# Altium PCB MCU_FOR_DOWNLOAD_V6_4_PCS.PcbDoc (part 2 of 2)
Units mil, origin at the board's own origin, x right, y up, seen from the top; angles counter-clockwise.
Board outline 2364.06 x 3482.09 mil, 4 copper layers (Top, GND1, GND2, Bottom), stack 35.4 mil thick; 140 components, 38 nets, 573 pads, 472 vias.
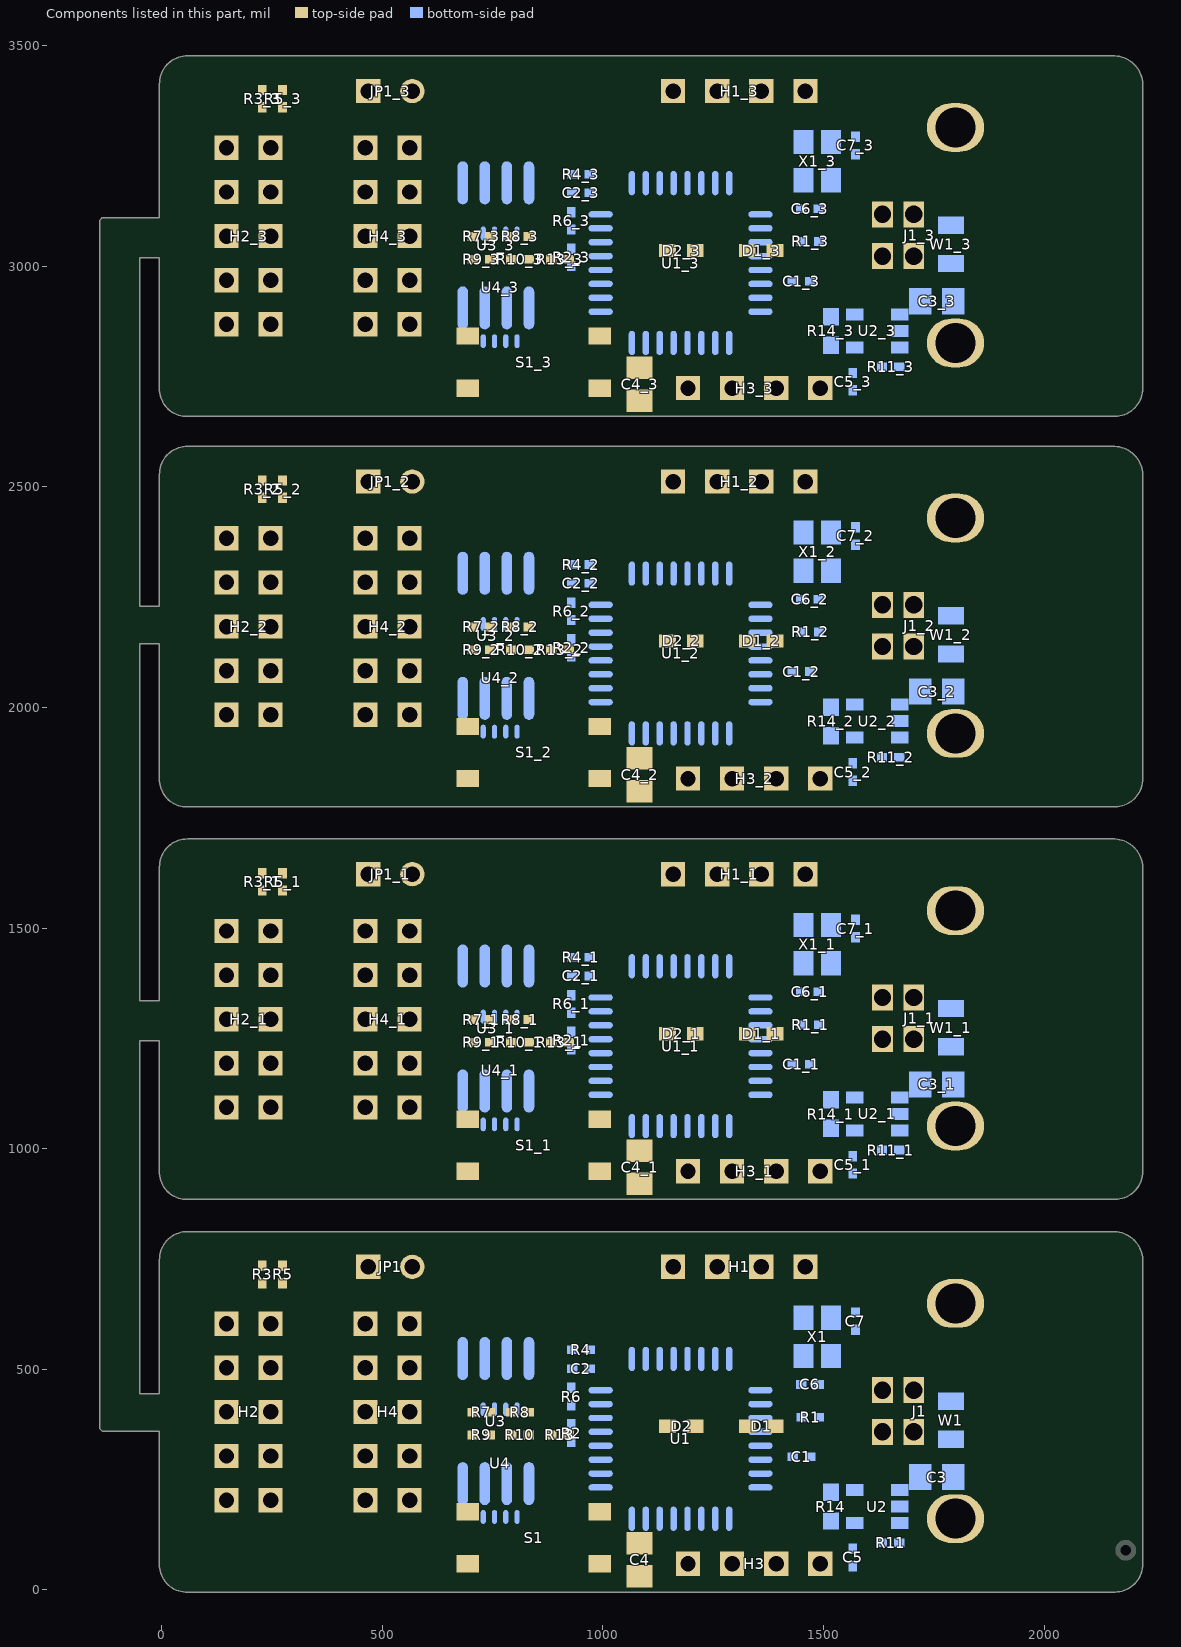
[diagram p2: the components of this part, seen from the top]

## Via types
v1: diameter 16/16/16/16 (per signal layer), hole 8, Top to Bottom, 468 vias
v2: diameter 55/55/55/55 (per signal layer), hole 37, Top to Bottom, 4 vias

## Nets (pads, with @x,y where several pads share a name; then routed paths per layer and width w, separated by ;. In a path a pad name is that pad's centre, name@x,y a point inside that pad or via, vN(x,y) a via of type N, cw(c..) or ccw(c..) an arc to the next point about the centre after c; other vN are vias at no path point) (continued)
copper on no net: | length 89868.4
  Top w7.87: v1(41.34,1641.97) 79.53,1680.16 644.09,1680.16 648.03,1676.22 v1(648.03,1673.07) ; v1(41.34,2531.97) 79.53,2570.16 644.09,2570.16 648.03,2566.22 v1(648.03,2563.07) ; v1(41.34,3416.97) 79.53,3455.16 644.09,3455.16 648.03,3451.22 v1(648.03,3448.07) ; 67.32,1585.28 69.69,1585.28 ; 67.32,2475.28 69.69,2475.28 ; 67.32,3360.28 69.69,3360.28 ; 146.85,1093.54 194.88,1141.57 329.92,1141.57 422.44,1049.06 594.49,1049.06 656.3,1110.87 1048.03,1110.87 v1(1074.41,1084.49) ; 146.85,1193.54 146.85,1194.72 192.52,1240.39 322.34,1240.39 409.45,1153.29 605.02,1153.29 617.32,1140.98 1081.69,1140.98 v1(1127.95,1094.72) ; 146.85,1493.54 149.2,1493.54 203.54,1439.2 203.54,1437.24 292.52,1437.24 314.57,1415.2 314.57,1344.33 425.59,1233.31 597.05,1233.31 674.8,1155.55 1155.71,1155.55 v1(1222.44,1088.82) ; 146.85,1983.54 194.88,2031.57 329.92,2031.57 422.44,1939.06 594.49,1939.06 656.3,2000.87 1048.03,2000.87 v1(1074.41,1974.49) ; 146.85,2083.54 146.85,2084.72 192.52,2130.39 322.34,2130.39 409.45,2043.29 605.02,2043.29 617.32,2030.98 1081.69,2030.98 v1(1127.95,1984.72) ; 146.85,2383.54 149.2,2383.54 203.54,2329.2 203.54,2327.24 292.52,2327.24 314.57,2305.2 314.57,2234.33 425.59,2123.31 597.05,2123.31 674.8,2045.55 1155.71,2045.55 v1(1222.44,1978.82) ; 146.85,2868.54 194.88,2916.57 329.92,2916.57 422.44,2824.06 594.49,2824.06 656.3,2885.87 1048.03,2885.87 v1(1074.41,2859.49) ; 146.85,2968.54 146.85,2969.72 192.52,3015.39 322.34,3015.39 409.45,2928.29 605.02,2928.29 617.32,2915.98 1081.69,2915.98 v1(1127.95,2869.72) ; 146.85,3268.54 149.2,3268.54 203.54,3214.2 203.54,3212.24 292.52,3212.24 314.57,3190.2 314.57,3119.33 425.59,3008.31 597.05,3008.31 674.8,2930.55 1155.71,2930.55 v1(1222.44,2863.82) ; v1(196.85,1054.96) 202.76,1054.96 238.58,1019.13 622.83,1019.13 v1@648.83,1045.13 ; v1(196.85,1944.96) 202.76,1944.96 238.58,1909.13 622.83,1909.13 v1@648.83,1935.13 ; v1(196.85,2829.96) 202.76,2829.96 238.58,2794.13 622.83,2794.13 v1@648.83,2820.13 ; 227.95,1624.65 274.02,1624.65 ; 227.95,2514.65 274.02,2514.65 ; 227.95,3399.65 274.02,3399.65 ; 246.85,1093.54 251.68,1093.54 255.02,1090.2 257.58,1090.2 314.17,1033.6 600.39,1033.6 663.78,1096.99 1025.89,1096.99 1059.65,1063.23 1135.33,1063.23 1156.59,1084.49 1156.99,1084.49 1156.99,1088.33 v1(1159.45,1090.79) ; 246.85,1193.54 327.17,1193.54 327.36,1193.74 385.83,1135.28 599.21,1135.28 609.06,1125.43 1063.78,1125.43 v1(1096.46,1092.76) ; 246.85,1493.54 246.85,1496.69 251.18,1501.02 251.18,1601.81 274.02,1624.65 ; 246.85,1983.54 251.68,1983.54 255.02,1980.2 257.58,1980.2 314.17,1923.6 600.39,1923.6 663.78,1986.99 1025.89,1986.99 1059.65,1953.23 1135.33,1953.23 1156.59,1974.49 1156.99,1974.49 1156.99,1978.33 v1(1159.45,1980.79) ; 246.85,2083.54 327.17,2083.54 327.36,2083.74 385.83,2025.28 599.21,2025.28 609.06,2015.43 1063.78,2015.43 v1(1096.46,1982.76) ; 246.85,2383.54 246.85,2386.69 251.18,2391.02 251.18,2491.81 274.02,2514.65 ; 246.85,2868.54 251.68,2868.54 255.02,2865.2 257.58,2865.2 314.17,2808.6 600.39,2808.6 663.78,2871.99 1025.89,2871.99 1059.65,2838.23 1135.33,2838.23 1156.59,2859.49 1156.99,2859.49 1156.99,2863.33 v1(1159.45,2865.79) ; 246.85,2968.54 327.17,2968.54 327.36,2968.74 385.83,2910.28 599.21,2910.28 609.06,2900.43 1063.78,2900.43 v1(1096.46,2867.76) ; 246.85,3268.54 246.85,3271.69 251.18,3276.02 251.18,3376.81 274.02,3399.65 ; 461.81,1493.54 460.63,1493.54 458.27,1491.18 458.86,1490.59 497.24,1452.2 759.45,1452.2 826.77,1384.88 869.29,1384.88 v1(872.05,1382.13) ; 461.81,2383.54 460.63,2383.54 458.27,2381.18 458.86,2380.59 497.24,2342.2 759.45,2342.2 826.77,2274.88 869.29,2274.88 v1(872.05,2272.13) ; 461.81,3268.54 460.63,3268.54 458.27,3266.18 458.86,3265.59 497.24,3227.2 759.45,3227.2 826.77,3159.88 869.29,3159.88 v1(872.05,3157.13) ; v1(692.91,1187.24) 693.31,1187.24 710.63,1169.92 1176.77,1169.92 v1(1185.04,1161.65) ; v1(692.91,1360.47) v1(1149.61,1360.47) ; v1(692.91,2077.24) 693.31,2077.24 710.63,2059.92 1176.77,2059.92 v1(1185.04,2051.65) ; v1(692.91,2250.47) v1(1149.61,2250.47) ; v1(692.91,2962.24) 693.31,2962.24 710.63,2944.92 1176.77,2944.92 v1(1185.04,2936.65) ; v1(692.91,3135.47) v1(1149.61,3135.47) ; 704.72,1292.76 704.72,1320.31 725.2,1340.79 874.8,1340.79 ; 704.72,2182.76 704.72,2210.31 725.2,2230.79 874.8,2230.79 ; 704.72,3067.76 704.72,3095.31 725.2,3115.79 874.8,3115.79 ; v1(753.94,1321.1) 753.54,1320.71 751.18,1320.71 744.09,1313.62 744.09,1292.76 744.09,1241.18 704.72,1241.18 706.5,1239.41 706.5,1227.99 ; v1(753.94,2211.1) 753.54,2210.71 751.18,2210.71 744.09,2203.62 744.09,2182.76 744.09,2131.18 704.72,2131.18 706.5,2129.41 706.5,2117.99 ; v1(753.94,3096.1) 753.54,3095.71 751.18,3095.71 744.09,3088.62 744.09,3067.76 744.09,3016.18 704.72,3016.18 706.5,3014.41 706.5,3002.99 ; v1(783.46,1321.1) 803.15,1321.1 831.5,1292.76 ; v1(783.46,2211.1) 803.15,2211.1 831.5,2182.76 ; v1(783.46,3096.1) 803.15,3096.1 831.5,3067.76 ; v1(791.34,1210.87) 795.67,1206.54 795.67,1206.34 1225.2,1206.34 1261.42,1242.56 1261.42,1295.12 v1(1309.06,1342.76) ; v1(791.34,2100.87) 795.67,2096.54 795.67,2096.34 1225.2,2096.34 1261.42,2132.56 1261.42,2185.12 v1(1309.06,2232.76) ; v1(791.34,2985.87) 795.67,2981.54 795.67,2981.34 1225.2,2981.34 1261.42,3017.56 1261.42,3070.12 v1(1309.06,3117.76) ; 792.13,1292.76 790.55,1292.76 767.5,1269.7 767.5,1240.79 767.13,1191.57 766.54,1188.43 ; 792.13,2182.76 790.55,2182.76 767.5,2159.7 767.5,2130.79 767.13,2081.57 766.54,2078.43 ; 792.13,3067.76 790.55,3067.76 767.5,3044.7 767.5,3015.79 767.13,2966.57 766.54,2963.43 ; 829.12,1291.95 829.12,1291.59 828.74,1291.22 828.74,1279.37 792.13,1242.76 792.13,1241.18 831.5,1241.18 832.28,1240.39 832.28,1238.03 838.39,1231.93 838.39,1230.75 v1(844.49,1224.65) ; 829.13,2131.18 792.13,2131.18 792.13,2132.76 828.74,2169.37 828.74,2181.22 829.12,2181.59 829.12,2181.95 ; 829.12,3066.95 829.12,3066.59 828.74,3066.22 828.74,3054.37 792.13,3017.76 792.13,3016.18 831.5,3016.18 832.28,3015.39 832.28,3013.03 838.39,3006.93 838.39,3005.75 v1(844.49,2999.65) ; 831.5,2131.18 832.28,2130.39 832.28,2128.03 838.39,2121.93 838.39,2120.75 v1(844.49,2114.65) ; 874.8,1241.57 874.8,1340.79 ; 874.8,2131.57 874.8,2230.79 ; 874.8,3016.57 874.8,3115.79 ; 883.07,1241.18 922.44,1241.18 v1(893.7,1269.92) ; 883.07,2131.18 922.44,2131.18 v1(893.7,2159.92) ; 883.07,3016.18 922.44,3016.18 v1(893.7,3044.92) ; v1(944.88,1069.13) 991.34,1069.13 993.31,1067.17 ; v1(944.88,1959.13) 991.34,1959.13 993.31,1957.17 ; v1(944.88,2844.13) 991.34,2844.13 993.31,2842.17 ; v1(948.82,1265.98) 1143.31,1265.98 1146.17,1263.13 1146.17,1260.87 ; v1(948.82,2155.98) 1143.31,2155.98 1146.17,2153.13 1146.17,2150.87 ; v1(948.82,3040.98) 1143.31,3040.98 1146.17,3038.13 1146.17,3035.87 ; v1(1191.73,1378.98) 1192.52,1378.19 1192.52,1372.68 1160.63,1340.79 874.8,1340.79 ; v1(1191.73,2268.98) 1192.52,2268.19 1192.52,2262.68 1160.63,2230.79 874.8,2230.79 ; v1(1191.73,3153.98) 1192.52,3153.19 1192.52,3147.68 1160.63,3115.79 874.8,3115.79 ; v1(1222.44,1122.28) 1223.62,1123.46 1283.86,1123.46 1309.65,1097.68 1583.27,1097.68 1639.76,1041.18 1640.16,1041.57 v1(1702.76,1041.57) ; v1(1222.44,2012.28) 1223.62,2013.46 1283.86,2013.46 1309.65,1987.68 1583.27,1987.68 1639.76,1931.18 1640.16,1931.57 v1(1702.76,1931.57) ; v1(1222.44,2897.28) 1223.62,2898.46 1283.86,2898.46 1309.65,2872.68 1583.27,2872.68 1639.76,2816.18 1640.16,2816.57 v1(1702.76,2816.57) ; v1(1263.78,1096.69) 1263.39,1082.13 1218.9,1037.64 v1(944.88,1037.64) 660.24,1037.64 649.21,1044.89 v1@648.83,1045.13 ; v1(1263.78,1986.69) 1263.39,1972.13 1218.9,1927.64 v1(944.88,1927.64) 660.24,1927.64 649.21,1934.89 v1@648.83,1935.13 ; v1(1263.78,2871.69) 1263.39,2857.13 1218.9,2812.64 v1(944.88,2812.64) 660.24,2812.64 649.21,2819.89 v1@648.83,2820.13 ; v1(1311.02,1311.26) 1309.45,1312.83 1305.12,1312.83 1301.77,1309.49 1300.98,1309.49 1280.51,1289.02 1280.51,1216.57 1252.36,1188.43 766.54,1188.43 ; v1(1311.02,2201.26) 1309.45,2202.83 1305.12,2202.83 1301.77,2199.49 1300.98,2199.49 1280.51,2179.02 1280.51,2106.57 1252.36,2078.43 766.54,2078.43 ; v1(1311.02,3086.26) 1309.45,3087.83 1305.12,3087.83 1301.77,3084.49 1300.98,3084.49 1280.51,3064.02 1280.51,2991.57 1252.36,2963.43 766.54,2963.43 ; v1(1322.83,1286.06) 1327.27,1281.63 1327.27,1260.87 ; v1(1322.83,2176.06) 1327.27,2171.63 1327.27,2150.87 ; v1(1322.83,3061.06) 1327.27,3056.63 1327.27,3035.87 ; 1390.26,1260.87 1390.26,1262.44 1405.91,1262.44 v1(1425.2,1281.73) ; 1390.26,2150.87 1390.26,2152.44 1405.91,2152.44 v1(1425.2,2171.73) ; 1390.26,3035.87 1390.26,3037.44 1405.91,3037.44 v1(1425.2,3056.73) ; 274.02,1624.65 274.02,1585.28 316.14,1585.28 381.89,1519.53 381.89,1374.25 411.42,1344.72 v1(600.39,1344.72) 701.97,1243.15 701.97,1241.18 701.97,1232.52 706.5,1227.99 ; 274.02,2514.65 274.02,2475.28 316.14,2475.28 381.89,2409.53 381.89,2264.25 411.42,2234.72 v1(600.39,2234.72) 701.97,2133.15 701.97,2131.18 701.97,2122.52 706.5,2117.99 ; 274.02,3399.65 274.02,3360.28 316.14,3360.28 381.89,3294.53 381.89,3149.25 411.42,3119.72 v1(600.39,3119.72) 701.97,3018.15 701.97,3016.18 701.97,3007.52 706.5,3002.99 ; v1@648.83,1045.13 v1(650.39,1046.69) 646.46,1046.69 v1@648.83,1045.13 ; v1@648.83,1935.13 v1(650.39,1936.69) 646.46,1936.69 v1@648.83,1935.13 ; v1@648.83,2820.13 v1(650.39,2821.69) 646.46,2821.69 v1@648.83,2820.13 ; 706.5,1227.99 743.5,1190.98 746.06,1188.43 766.54,1188.43 ; 706.5,2117.99 743.5,2080.98 746.06,2078.43 766.54,2078.43 ; 706.5,3002.99 743.5,2965.98 746.06,2963.43 766.54,2963.43
  Top w11.81: 69.69,1585.28 227.95,1585.28 ; 69.69,2475.28 227.95,2475.28 ; 69.69,3360.28 227.95,3360.28
  Top w19.68: 694.09,1067.17 944.88,1067.17 993.31,1067.17 ; 694.09,1957.17 944.88,1957.17 993.31,1957.17 ; 694.09,2842.17 944.88,2842.17 993.31,2842.17 ; 1083.07,920.63 1083.94,921.5 v1(1137.8,921.5) ; 1083.07,1810.63 1083.94,1811.5 v1(1137.8,1811.5) ; 1083.07,2695.63 1083.94,2696.5 v1(1137.8,2696.5)
  Top w22.05: v1(1035.43,909.69) 1072.13,909.69 1078.39,915.95 1083.07,920.63 ; v1(1035.43,1799.69) 1072.13,1799.69 1078.39,1805.95 1083.07,1810.63 ; v1(1035.43,2684.69) 1072.13,2684.69 1078.39,2690.95 1083.07,2695.63
  Top w23.62: 246.85,1393.54 246,1392.69 246,1386.61 205.51,1346.12 205.51,1344.72 67.32,1344.72 ; 246.85,2283.54 246,2282.69 246,2276.61 205.51,2236.12 205.51,2234.72 67.32,2234.72 ; 246.85,3168.54 246,3167.69 246,3161.61 205.51,3121.12 205.51,3119.72 67.32,3119.72 ; 468.11,1622.28 468.11,1623.46 436.61,1654.96 125.2,1654.96 67.32,1597.09 67.32,1585.28 67.32,1344.72 ; 468.11,2512.28 468.11,2513.46 436.61,2544.96 125.2,2544.96 67.32,2487.09 67.32,2475.28 67.32,2234.72 ; 468.11,3397.28 468.11,3398.46 436.61,3429.96 125.2,3429.96 67.32,3372.09 67.32,3360.28 67.32,3119.72 ; 568.11,1622.28 589.17,1601.22 589.57,1601.22 605.12,1585.67 1066.54,1585.67 1231.1,1421.1 1231.1,1384.88 ; 568.11,2512.28 589.17,2491.22 589.57,2491.22 605.12,2475.67 1066.54,2475.67 1231.1,2311.1 1231.1,2274.88 ; 568.11,3397.28 589.17,3376.22 589.57,3376.22 605.12,3360.67 1066.54,3360.67 1231.1,3196.1 1231.1,3159.88 ; 1083.07,995.59 1074.49,1004.17 662.2,1004.17 639.37,981.34 125.2,981.34 67.32,1039.21 67.32,1344.72 ; 1083.07,1885.59 1074.49,1894.17 662.2,1894.17 639.37,1871.34 125.2,1871.34 67.32,1929.21 67.32,2234.72 ; 1083.07,2770.59 1074.49,2779.17 662.2,2779.17 639.37,2756.34 125.2,2756.34 67.32,2814.21 67.32,3119.72 ; 1209.16,1260.87 1231.1,1282.81 1231.1,1384.88 ; 1209.16,2150.87 1231.1,2172.81 1231.1,2274.88 ; 1209.16,3035.87 1231.1,3057.81 1231.1,3159.88 ; v1(1397.64,1185.28) 1490.94,1278.58 v1@1518.9,1278.58 ; v1(1397.64,2075.28) 1490.94,2168.58 v1@1518.9,2168.58 ; v1(1397.64,2960.28) 1490.94,3053.58 v1@1518.9,3053.58 ; v1(1519.69,1277.8) v1@1518.9,1278.58 ; v1(1519.69,2167.8) v1@1518.9,2168.58 ; v1(1519.69,3052.8) v1@1518.9,3053.58 ; 1231.1,1384.88 1412.6,1384.88 v1@1518.9,1278.58 ; 1231.1,2274.88 1412.6,2274.88 v1@1518.9,2168.58 ; 1231.1,3159.88 1412.6,3159.88 v1@1518.9,3053.58
  Top w31.5: 1083.07,995.59 1095.2,1007.72 1283.86,1007.72 1333.46,1056.54 v2(1348.03,1056.54) ; 1083.07,1885.59 1095.2,1897.72 1283.86,1897.72 1333.46,1946.54 v2(1348.03,1946.54) ; 1083.07,2770.59 1095.2,2782.72 1283.86,2782.72 1333.46,2831.54 v2(1348.03,2831.54)
  Bottom w7.87: 146.85,1393.54 194.88,1441.57 413.78,1441.57 461.81,1393.54 508.27,1440 509.06,1440 509.84,1440.79 582.68,1440.79 601.57,1459.69 601.57,1497.09 637.4,1532.91 878.74,1532.91 966.14,1445.51 966.14,1434.09 966.14,1432.91 968.9,1432.91 970.08,1434.09 970.08,1391.58 970.08,1389.61 928.35,1347.87 ; 146.85,2283.54 194.88,2331.57 413.78,2331.57 461.81,2283.54 508.27,2330 509.06,2330 509.84,2330.79 582.68,2330.79 601.57,2349.69 601.57,2387.09 637.4,2422.91 878.74,2422.91 966.14,2335.51 966.14,2324.09 966.14,2322.91 968.9,2322.91 970.08,2324.09 970.08,2281.58 970.08,2279.61 928.35,2237.87 ; 146.85,3168.54 194.88,3216.57 413.78,3216.57 461.81,3168.54 508.27,3215 509.06,3215 509.84,3215.79 582.68,3215.79 601.57,3234.69 601.57,3272.09 637.4,3307.91 878.74,3307.91 966.14,3220.51 966.14,3209.09 966.14,3207.91 968.9,3207.91 970.08,3209.09 970.08,3166.58 970.08,3164.61 928.35,3122.87 ; 461.81,1193.54 511.42,1243.15 511.42,1243.94 598.82,1243.94 638.58,1283.7 638.58,1432.91 638.98,1433.31 638.98,1470.31 661.02,1492.36 753.9,1492.36 785.12,1461.14 785.12,1417.05 782.48,1414.41 782.48,1321.1 v1@782.48,1320.31 ; 461.81,2083.54 511.42,2133.15 511.42,2133.94 598.82,2133.94 638.58,2173.7 638.58,2322.91 638.98,2323.31 638.98,2360.31 661.02,2382.36 753.9,2382.36 785.12,2351.14 785.12,2307.05 782.48,2304.41 782.48,2211.1 v1@782.48,2210.31 ; 461.81,2968.54 511.42,3018.15 511.42,3018.94 598.82,3018.94 638.58,3058.7 638.58,3207.91 638.98,3208.31 638.98,3245.31 661.02,3267.36 753.9,3267.36 785.12,3236.14 785.12,3192.05 782.48,3189.41 782.48,3096.1 v1@782.48,3095.31 ; 463.55,1096.92 464.09,1096.92 465.75,1098.58 466.54,1098.58 507.56,1139.61 587.8,1139.61 728.74,1280.55 728.74,1299.45 728.74,1323.86 692.52,1360.08 v1@692.13,1360.47 ; 463.55,1986.92 464.09,1986.92 465.75,1988.58 466.54,1988.58 507.56,2029.61 587.8,2029.61 728.74,2170.55 728.74,2189.45 728.74,2213.86 692.52,2250.08 v1@692.13,2250.47 ; 463.55,2871.92 464.09,2871.92 465.75,2873.58 466.54,2873.58 507.56,2914.61 587.8,2914.61 728.74,3055.55 728.74,3074.45 728.74,3098.86 692.52,3135.08 v1@692.13,3135.47 ; 561.81,1193.54 575.2,1193.54 575.98,1192.76 658.27,1275.04 658.27,1461.26 673.23,1476.22 715.94,1476.22 732.48,1459.69 732.48,1414.41 733.86,1413.03 733.86,1370.71 754.33,1350.24 754.33,1321.1 v1(753.94,1321.1) 754.33,1320.71 754.33,1299.45 ; 561.81,1493.54 618.11,1549.84 929.53,1549.84 1044.49,1434.88 1044.49,1171.5 1026.77,1153.78 994.88,1153.78 994.09,1154.57 962.6,1154.57 835.83,1027.8 766.54,1027.8 754.33,1040 754.33,1055.35 754.33,1077.8 733.07,1099.06 733.07,1130.35 732.48,1130.94 ; 561.81,2083.54 575.2,2083.54 575.98,2082.76 658.27,2165.04 658.27,2351.26 673.23,2366.22 715.94,2366.22 732.48,2349.69 732.48,2304.41 733.86,2303.03 733.86,2260.71 754.33,2240.24 754.33,2211.1 v1(753.94,2211.1) 754.33,2210.71 754.33,2189.45 ; 561.81,2383.54 618.11,2439.84 929.53,2439.84 1044.49,2324.88 1044.49,2061.5 1026.77,2043.78 994.88,2043.78 994.09,2044.57 962.6,2044.57 835.83,1917.8 766.54,1917.8 754.33,1930 754.33,1945.35 754.33,1967.8 733.07,1989.06 733.07,2020.35 732.48,2020.94 ; 561.81,2968.54 575.2,2968.54 575.98,2967.76 658.27,3050.04 658.27,3236.26 673.23,3251.22 715.94,3251.22 732.48,3234.69 732.48,3189.41 733.86,3188.03 733.86,3145.71 754.33,3125.24 754.33,3096.1 v1(753.94,3096.1) 754.33,3095.71 754.33,3074.45 ; 561.81,3268.54 618.11,3324.84 929.53,3324.84 1044.49,3209.88 1044.49,2946.5 1026.77,2928.78 994.88,2928.78 994.09,2929.57 962.6,2929.57 835.83,2802.8 766.54,2802.8 754.33,2815 754.33,2830.35 754.33,2852.8 733.07,2874.06 733.07,2905.35 732.48,2905.94 ; 565.4,1100.1 569.82,1100.1 570.87,1099.06 677.97,1206.16 782.48,1206.16 782.48,1203.78 ; 565.4,1990.1 569.82,1990.1 570.87,1989.06 677.97,2096.16 782.48,2096.16 782.48,2093.78 ; 565.4,2875.1 569.82,2875.1 570.87,2874.06 677.97,2981.16 782.48,2981.16 782.48,2978.78 ; 682.48,1414.41 683.46,1413.43 683.46,1369.13 v1@692.13,1360.47 ; 682.48,2304.41 683.46,2303.43 683.46,2259.13 v1@692.13,2250.47 ; 682.48,3189.41 683.46,3188.43 683.46,3144.13 v1@692.13,3135.47 ; v1(692.91,1187.24) 692.91,1186.65 682.48,1176.22 ; v1(692.91,1360.47) v1@692.13,1360.47 ; v1(692.91,2077.24) 692.91,2076.65 682.48,2066.22 ; v1(692.91,2250.47) v1@692.13,2250.47 ; v1(692.91,2962.24) 692.91,2961.65 682.48,2951.22 ; v1(692.91,3135.47) v1@692.13,3135.47 ; 779.92,1055.35 779.92,1109.69 782.48,1112.24 782.48,1130.94 782.48,1203.78 ; 779.92,1299.45 782.48,1302.01 v1@782.48,1320.31 ; 779.92,1945.35 779.92,1999.69 782.48,2002.24 782.48,2020.94 782.48,2093.78 ; 779.92,2189.45 782.48,2192.01 v1@782.48,2210.31 ; 779.92,2830.35 779.92,2884.69 782.48,2887.24 782.48,2905.94 782.48,2978.78 ; 779.92,3074.45 782.48,3077.01 v1@782.48,3095.31 ; v1(783.46,1321.1) 782.68,1320.31 v1@782.48,1320.31 ; v1(783.46,2211.1) 782.68,2210.31 v1@782.48,2210.31 ; v1(783.46,3096.1) 782.68,3095.31 v1@782.48,3095.31 ; v1(791.34,1210.87) 784.25,1203.78 782.48,1203.78 ; v1(791.34,2100.87) 784.25,2093.78 782.48,2093.78 ; v1(791.34,2985.87) 784.25,2978.78 782.48,2978.78 ; 805.51,1055.35 805.51,1082.13 832.48,1109.09 832.48,1130.94 833.07,1131.54 833.07,1162.05 816.93,1178.19 816.93,1247.09 839.76,1269.92 v1(893.7,1269.92) 893.7,1360.47 v1(872.05,1382.13) ; 805.51,1945.35 805.51,1972.13 832.48,1999.09 832.48,2020.94 833.07,2021.54 833.07,2052.05 816.93,2068.19 816.93,2137.09 839.76,2159.92 v1(893.7,2159.92) 893.7,2250.47 v1(872.05,2272.13) ; 805.51,2830.35 805.51,2857.13 832.48,2884.09 832.48,2905.94 833.07,2906.54 833.07,2937.05 816.93,2953.19 816.93,3022.09 839.76,3044.92 v1(893.7,3044.92) 893.7,3135.47 v1(872.05,3157.13) ; v1(844.49,1224.65) 845.28,1224.65 884.65,1185.28 994.88,1185.28 ; v1(844.49,2114.65) 845.28,2114.65 884.65,2075.28 994.88,2075.28 ; v1(844.49,2999.65) 845.28,2999.65 884.65,2960.28 994.88,2960.28 ; 852.76,1414.41 853.94,1415.59 ; 852.76,2304.41 853.94,2305.59 ; 852.76,3189.41 853.94,3190.59 ; v1(910.63,1391.57) 911.02,1391.57 930.71,1391.57 ; v1(910.63,2281.57) 911.02,2281.57 930.71,2281.57 ; v1(910.63,3166.57) 911.02,3166.57 930.71,3166.57 ; 928.35,1225.83 948.82,1225.83 970.47,1247.48 994.09,1247.48 994.88,1248.27 ; 928.35,1265.2 948.03,1265.2 v1(948.82,1265.98) ; 928.35,1308.5 929.92,1308.5 964.17,1342.76 994.88,1342.76 ; 928.35,2115.83 948.82,2115.83 970.47,2137.48 994.09,2137.48 994.88,2138.27 ; 928.35,2155.2 948.03,2155.2 v1(948.82,2155.98) ; 928.35,2198.5 929.92,2198.5 964.17,2232.76 994.88,2232.76 ; 928.35,3000.83 948.82,3000.83 970.47,3022.48 994.09,3022.48 994.88,3023.27 ; 928.35,3040.2 948.03,3040.2 v1(948.82,3040.98) ; 928.35,3083.5 929.92,3083.5 964.17,3117.76 994.88,3117.76 ; v1(944.88,1037.64) 972.05,1037.64 1011.02,1076.61 1011.02,1083.7 ; v1(944.88,1069.13) 945.28,1069.53 945.28,1104.17 963.39,1122.28 994.88,1122.28 ; v1(944.88,1927.64) 972.05,1927.64 1011.02,1966.61 1011.02,1973.7 ; v1(944.88,1959.13) 945.28,1959.53 945.28,1994.17 963.39,2012.28 994.88,2012.28 ; v1(944.88,2812.64) 972.05,2812.64 1011.02,2851.61 1011.02,2858.7 ; v1(944.88,2844.13) 945.28,2844.53 945.28,2879.17 963.39,2897.28 994.88,2897.28 ; 1065.75,1051.42 1065.75,1075.83 v1(1074.41,1084.49) ; 1065.75,1413.62 1065.75,1449.45 1159.06,1542.76 1159.06,1622.28 ; 1065.75,1941.42 1065.75,1965.83 v1(1074.41,1974.49) ; 1065.75,2303.62 1065.75,2339.45 1159.06,2432.76 1159.06,2512.28 ; 1065.75,2826.42 1065.75,2850.83 v1(1074.41,2859.49) ; 1065.75,3188.62 1065.75,3224.45 1159.06,3317.76 1159.06,3397.28 ; v1(1074.8,1228.58) 1075.2,1228.19 1075.2,1147.87 ; v1(1074.8,2118.58) 1075.2,2118.19 1075.2,2037.87 ; v1(1074.8,3003.58) 1075.2,3003.19 1075.2,2922.87 ; v1(1096.46,1092.76) 1097.24,1091.97 1097.24,1051.42 ; v1(1096.46,1982.76) 1097.24,1981.97 1097.24,1941.42 ; v1(1096.46,2867.76) 1097.24,2866.97 1097.24,2826.42 ; 1097.24,1413.62 1097.24,1447.09 1259.06,1608.9 1259.06,1622.28 ; 1097.24,2303.62 1097.24,2337.09 1259.06,2498.9 1259.06,2512.28 ; 1097.24,3188.62 1097.24,3222.09 1259.06,3383.9 1259.06,3397.28 ; v1(1127.95,1094.72) 1128.74,1093.94 1128.74,1051.42 ; v1(1127.95,1984.72) 1128.74,1983.94 1128.74,1941.42 ; v1(1127.95,2869.72) 1128.74,2868.94 1128.74,2826.42 ; 1128.74,1413.62 1128.74,1447.48 1240.16,1558.9 1307.09,1558.9 1359.06,1610.87 1359.06,1622.28 ; 1128.74,2303.62 1128.74,2337.48 1240.16,2448.9 1307.09,2448.9 1359.06,2500.87 1359.06,2512.28 ; 1128.74,3188.62 1128.74,3222.48 1240.16,3333.9 1307.09,3333.9 1359.06,3385.87 1359.06,3397.28 ; v1(1149.61,1360.47) 1208.27,1360.47 1208.66,1360.08 1223.23,1374.65 1223.23,1413.62 ; v1(1149.61,2250.47) 1208.27,2250.47 1208.66,2250.08 1223.23,2264.65 1223.23,2303.62 ; v1(1149.61,3135.47) 1208.27,3135.47 1208.66,3135.08 1223.23,3149.65 1223.23,3188.62 ; v1(1159.45,1090.79) 1160.24,1090 1160.24,1051.42 ; v1(1159.45,1980.79) 1160.24,1980 1160.24,1941.42 ; v1(1159.45,2865.79) 1160.24,2865 1160.24,2826.42 ; 1160.24,1413.62 1160.24,1443.54 1254.33,1537.64 1377.56,1537.64 1450.79,1610.87 1459.06,1610.87 1459.45,1610.87 1459.45,1614.02 1459.06,1622.28 ; 1160.24,2303.62 1160.24,2333.54 1254.33,2427.64 1377.56,2427.64 1450.79,2500.87 1459.06,2500.87 1459.45,2500.87 1459.45,2504.02 1459.06,2512.28 ; 1160.24,3188.62 1160.24,3218.54 1254.33,3312.64 1377.56,3312.64 1450.79,3385.87 1459.06,3385.87 1459.45,3385.87 1459.45,3389.02 1459.06,3397.28 ; 1191.73,1051.42 1191.73,1091.18 1222.44,1121.89 v1(1222.44,1122.28) ; v1(1191.73,1378.98) 1191.73,1413.62 ; 1191.73,1941.42 1191.73,1981.18 1222.44,2011.89 v1(1222.44,2012.28) ; v1(1191.73,2268.98) 1191.73,2303.62 ; 1191.73,2826.42 1191.73,2866.18 1222.44,2896.89 v1(1222.44,2897.28) ; v1(1191.73,3153.98) 1191.73,3188.62 ; v1(1222.44,1088.82) 1223.23,1088.03 1223.23,1051.42 ; v1(1222.44,1978.82) 1223.23,1978.03 1223.23,1941.42 ; v1(1222.44,2863.82) 1223.23,2863.03 1223.23,2826.42 ; 1254.72,1051.42 1254.72,1012.05 1297.01,969.76 1297.01,949.26 1300.59,949.26 1292.91,949.06 ; 1254.72,1413.62 1254.72,1433.7 1281.5,1460.47 1473.62,1460.47 1512.99,1499.84 1512.99,1506.93 1512.99,1507.32 1516.22,1507.32 1516.61,1506.93 1543.31,1480.24 1543.31,1479.37 1572.44,1479.37 ; 1254.72,1941.42 1254.72,1902.05 1297.01,1859.76 1297.01,1839.26 1300.59,1839.26 1292.91,1839.06 ; 1254.72,2303.62 1254.72,2323.7 1281.5,2350.47 1473.62,2350.47 1512.99,2389.84 1512.99,2396.93 1512.99,2397.32 1516.22,2397.32 1516.61,2396.93 1543.31,2370.24 1543.31,2369.37 1572.44,2369.37 ; 1254.72,2826.42 1254.72,2787.05 1297.01,2744.76 1297.01,2724.26 1300.59,2724.26 1292.91,2724.06 ; 1254.72,3188.62 1254.72,3208.7 1281.5,3235.47 1473.62,3235.47 1512.99,3274.84 1512.99,3281.93 1512.99,3282.32 1516.22,3282.32 1516.61,3281.93 1543.31,3255.24 1543.31,3254.37 1572.44,3254.37 ; 1286.22,1051.42 1286.22,1013.62 1306.5,993.35 1359.06,993.35 1398.13,954.27 1400.79,951.61 1392.91,949.06 ; 1286.22,1413.62 1286.22,1434.09 1294.88,1442.76 1438.58,1442.76 1455.04,1426.3 1455.04,1420.31 1455.04,1414.33 1449.61,1408.9 1449.61,1355.75 ; 1286.22,1941.42 1286.22,1903.62 1306.5,1883.35 1359.06,1883.35 1398.13,1844.27 1400.79,1841.61 1392.91,1839.06 ; 1286.22,2303.62 1286.22,2324.09 1294.88,2332.76 1438.58,2332.76 1455.04,2316.3 1455.04,2310.31 1455.04,2304.33 1449.61,2298.9 1449.61,2245.75 ; 1286.22,2826.42 1286.22,2788.62 1306.5,2768.35 1359.06,2768.35 1398.13,2729.27 1400.79,2726.61 1392.91,2724.06 ; 1286.22,3188.62 1286.22,3209.09 1294.88,3217.76 1438.58,3217.76 1455.04,3201.3 1455.04,3195.31 1455.04,3189.33 1449.61,3183.9 1449.61,3130.75 ; v1(1309.06,1342.76) 1357.09,1342.76 ; v1(1309.06,2232.76) 1357.09,2232.76 ; v1(1309.06,3117.76) 1357.09,3117.76 ; v1(1311.02,1311.26) 1357.09,1311.26 ; v1(1311.02,2201.26) 1357.09,2201.26 ; v1(1311.02,3086.26) 1357.09,3086.26 ; v1(1322.83,1286.06) 1328.6,1280.3 1328.6,1280.01 1328.85,1279.76 1357.09,1279.76 1381.89,1279.76 v1(1395.67,1293.54) ; v1(1322.83,2176.06) 1328.6,2170.3 1328.6,2170.01 1328.85,2169.76 1357.09,2169.76 1381.89,2169.76 v1(1395.67,2183.54) ; v1(1322.83,3061.06) 1328.6,3055.3 1328.6,3055.01 1328.85,3054.76 1357.09,3054.76 1381.89,3054.76 v1(1395.67,3068.54) ; v1(1425.2,1281.73) 1450,1281.73 1450.39,1281.34 ; v1(1425.2,2171.73) 1450,2171.73 1450.39,2171.34 ; v1(1425.2,3056.73) 1450,3056.73 1450.39,3056.34 ; 1469.68,1191.58 1489.76,1191.58 v1(1490.16,1191.18) ; 1469.68,2081.58 1489.76,2081.58 v1(1490.16,2081.18) ; 1469.68,2966.58 1489.76,2966.58 v1(1490.16,2966.18) ; 1632.68,997.09 1619.29,1010.47 1617.72,1010.47 1617.72,1088.57 1646.88,1117.73 1647.02,1117.73 1647.24,1117.95 1673.23,1117.95 1674.02,1117.18 1673.23,1116.38 ; 1632.68,1887.09 1619.29,1900.47 1617.72,1900.47 1617.72,1978.57 1646.88,2007.73 1647.02,2007.73 1647.24,2007.95 1673.23,2007.95 1674.02,2007.18 1673.23,2006.38 ; 1632.68,2772.09 1619.29,2785.47 1617.72,2785.47 1617.72,2863.57 1646.88,2892.73 1647.02,2892.73 1647.24,2892.95 1673.23,2892.95 1674.02,2892.18 1673.23,2891.38 ; v1(1639.76,1078.98) 1673.23,1078.98 1690.94,1078.98 1691.73,1078.19 ; v1(1639.76,1968.98) 1673.23,1968.98 1690.94,1968.98 1691.73,1968.19 ; v1(1639.76,2853.98) 1673.23,2853.98 1690.94,2853.98 1691.73,2853.19 ; 1672.05,997.09 1673.23,998.27 1673.23,1041.57 v1(1702.76,1041.57) ; 1672.05,1887.09 1673.23,1888.27 1673.23,1931.57 v1(1702.76,1931.57) ; 1672.05,2772.09 1673.23,2773.27 1673.23,2816.57 v1(1702.76,2816.57) ; v1(1700.79,1069.13) 1691.73,1078.19 ; v1(1700.79,1959.13) 1691.73,1968.19 ; v1(1700.79,2844.13) 1691.73,2853.19 ; v1(1702.76,1088.82) 1692.13,1078.19 1691.73,1078.19 ; v1(1702.76,1978.82) 1692.13,1968.19 1691.73,1968.19 ; v1(1702.76,2863.82) 1692.13,2853.19 1691.73,2853.19 ; 682.48,1176.22 686.32,1131.84 682.48,1128 682.48,1130.94 682.48,1176.22 ; 682.48,2066.22 686.32,2021.84 682.48,2018 682.48,2020.94 682.48,2066.22 ; 682.48,2951.22 686.32,2906.84 682.48,2903 682.48,2905.94 682.48,2951.22
  Bottom w9.84: 1357.09,1153.78 1376.38,1153.78 ; 1357.09,2043.78 1376.38,2043.78 ; 1357.09,2928.78 1376.38,2928.78
  Bottom w11.81: 461.81,1093.54 463.55,1096.92 ; 461.81,1983.54 463.55,1986.92 ; 461.81,2868.54 463.55,2871.92 ; 561.81,1093.54 565.4,1097.13 565.4,1100.1 ; 561.81,1393.54 575.72,1393.54 620.08,1437.9 620.08,1485.28 644.88,1510.08 798.43,1510.08 832.48,1476.02 832.48,1414.41 ; 561.81,1983.54 565.4,1987.13 565.4,1990.1 ; 561.81,2283.54 575.72,2283.54 620.08,2327.9 620.08,2375.28 644.88,2400.08 798.43,2400.08 832.48,2366.02 832.48,2304.41 ; 561.81,2868.54 565.4,2872.13 565.4,2875.1 ; 561.81,3168.54 575.72,3168.54 620.08,3212.9 620.08,3260.28 644.88,3285.08 798.43,3285.08 832.48,3251.02 832.48,3189.41 ; 805.51,1299.45 805.51,1345.91 832.68,1373.07 832.68,1414.21 832.48,1414.41 ; 805.51,2189.45 805.51,2235.91 832.68,2263.07 832.68,2304.21 832.48,2304.41 ; 805.51,3074.45 805.51,3120.91 832.68,3148.07 832.68,3189.21 832.48,3189.41 ; 852.76,1414.41 832.48,1414.41 ; 852.76,2304.41 832.48,2304.41 ; 852.76,3189.41 832.48,3189.41 ; 853.94,1415.59 872.44,1434.09 930.71,1434.09 ; 853.94,2305.59 872.44,2324.09 930.71,2324.09 ; 853.94,3190.59 872.44,3209.09 930.71,3209.09 ; 1192.91,949.06 1190.76,949.27 1190.63,949.27 1161.32,978.58 1087.4,978.58 1045.28,1020.71 1044.88,1020.71 1044.88,1085.28 1144.09,1184.49 1151.97,1184.49 1152.76,1185.28 1357.09,1185.28 ; 1192.91,1839.06 1190.76,1839.27 1190.63,1839.27 1161.32,1868.58 1087.4,1868.58 1045.28,1910.71 1044.88,1910.71 1044.88,1975.28 1144.09,2074.49 1151.97,2074.49 1152.76,2075.28 1357.09,2075.28 ; 1192.91,2724.06 1190.76,2724.27 1190.63,2724.27 1161.32,2753.58 1087.4,2753.58 1045.28,2795.71 1044.88,2795.71 1044.88,2860.28 1144.09,2959.49 1151.97,2959.49 1152.76,2960.28 1357.09,2960.28
  Bottom w13.78: 1357.09,1216.77 1609.45,1216.77 1633.46,1240.79 1633.86,1241.18 1633.86,1248.27 ; 1357.09,1248.27 1534.25,1248.27 1551.18,1265.2 1580.71,1294.72 1668.9,1294.72 1704.72,1258.9 1704.72,1248.27 ; 1357.09,2106.77 1609.45,2106.77 1633.46,2130.79 1633.86,2131.18 1633.86,2138.27 ; 1357.09,2138.27 1534.25,2138.27 1551.18,2155.2 1580.71,2184.72 1668.9,2184.72 1704.72,2148.9 1704.72,2138.27 ; 1357.09,2991.77 1609.45,2991.77 1633.46,3015.79 1633.86,3016.18 1633.86,3023.27 ; 1357.09,3023.27 1534.25,3023.27 1551.18,3040.2 1580.71,3069.72 1668.9,3069.72 1704.72,3033.9 1704.72,3023.27 ; v1(1397.64,1185.28) 1424.02,1185.28 1430.32,1191.57 ; v1(1397.64,2075.28) 1424.02,2075.28 1430.32,2081.57 ; v1(1397.64,2960.28) 1424.02,2960.28 1430.32,2966.57
  Bottom w15.75: 1011.02,1083.7 1075.2,1147.87 ; 1011.02,1973.7 1075.2,2037.87 ; 1011.02,2858.7 1075.2,2922.87 ; 1357.09,1122.28 1370.87,1122.28 1389.37,1140.79 1376.38,1153.78 ; 1357.09,2012.28 1370.87,2012.28 1389.37,2030.79 1376.38,2043.78 ; 1357.09,2897.28 1370.87,2897.28 1389.37,2915.79 1376.38,2928.78
  Bottom w19.68: 1389.37,1140.79 1391.14,1142.56 1412.8,1142.56 1430.31,1160.08 1692.05,1160.08 1718.9,1146.07 1719.21,1145.91 ; 1389.37,2030.79 1391.14,2032.56 1412.8,2032.56 1430.31,2050.08 1692.05,2050.08 1718.9,2036.07 1719.21,2035.91 ; 1389.37,2915.79 1391.14,2917.56 1412.8,2917.56 1430.31,2935.08 1692.05,2935.08 1718.9,2921.07 1719.21,2920.91 ; 1516.93,1046.08 1522.66,1046.08 1527.17,1041.57 1566.54,1041.57 ; 1516.93,1936.08 1522.66,1936.08 1527.17,1931.57 1566.54,1931.57 ; 1516.93,2821.08 1522.66,2821.08 1527.17,2816.57 1566.54,2816.57 ; 1566.54,983.31 1566.54,1041.57 ; 1566.54,1873.31 1566.54,1931.57 ; 1566.54,2758.31 1566.54,2816.57 ; 1570.87,1041.57 1566.54,1041.57 ; 1570.87,1931.57 1566.54,1931.57 ; 1570.87,2816.57 1566.54,2816.57
  Bottom w23.62: 246.85,1393.54 277.95,1362.44 279.92,1362.44 298.82,1343.54 511.81,1343.54 561.81,1393.54 ; 246.85,2283.54 277.95,2252.44 279.92,2252.44 298.82,2233.54 511.81,2233.54 561.81,2283.54 ; 246.85,3168.54 277.95,3137.44 279.92,3137.44 298.82,3118.54 511.81,3118.54 561.81,3168.54 ; 1357.09,1185.28 v1(1397.64,1185.28) ; 1357.09,2075.28 v1(1397.64,2075.28) ; 1357.09,2960.28 v1(1397.64,2960.28) ; 1489.76,1281.34 1516.14,1281.34 v1(1519.69,1277.8) ; 1489.76,2171.34 1516.14,2171.34 v1(1519.69,2167.8) ; 1489.76,3056.34 1516.14,3056.34 v1(1519.69,3052.8)
  Bottom w27.56: 1674.02,1117.18 1688.98,1132.52 1712.99,1132.52 ; 1674.02,2007.18 1688.98,2022.52 1712.99,2022.52 ; 1674.02,2892.18 1688.98,2907.52 1712.99,2907.52
  Bottom w31.5: v2(1348.03,1056.54) 1400.29,1055.86 1455.51,1111.08 1516.93,1111.08 1565.57,1111.08 1570.87,1116.38 ; v2(1348.03,1946.54) 1400.29,1945.86 1455.51,2001.08 1516.93,2001.08 1565.57,2001.08 1570.87,2006.38 ; v2(1348.03,2831.54) 1400.29,2830.86 1455.51,2886.08 1516.93,2886.08 1565.57,2886.08 1570.87,2891.38 ; 1712.99,1132.52 1718.82,1132.52 1718.9,1135.19 ; 1712.99,2022.52 1718.82,2022.52 1718.9,2025.19 ; 1712.99,2907.52 1718.82,2907.52 1718.9,2910.19 ; 1788.98,1231.34 1718.9,1161.26 1718.9,1146.07 1718.9,1145.91 1718.9,1135.19 ; 1788.98,2121.34 1718.9,2051.26 1718.9,2036.07 1718.9,2035.91 1718.9,2025.19 ; 1788.98,3006.34 1718.9,2936.26 1718.9,2921.07 1718.9,2920.91 1718.9,2910.19 ; 1718.9,1135.19 1719.21,1145.91 1718.9,1133.23 1718.9,1135.19 ; 1718.9,2025.19 1719.21,2035.91 1718.9,2023.23 1718.9,2025.19 ; 1718.9,2910.19 1719.21,2920.91 1718.9,2908.23 1718.9,2910.19
  Bottom w39.37: 1633.86,1342.76 1629.14,1344.78 1628.99,1344.93 1628.99,1398.12 1648.43,1417.56 1744.09,1417.56 1788.98,1372.68 1788.98,1317.95 ; 1633.86,2232.76 1629.14,2234.78 1628.99,2234.93 1628.99,2288.12 1648.43,2307.56 1744.09,2307.56 1788.98,2262.68 1788.98,2207.95 ; 1633.86,3117.76 1629.14,3119.78 1628.99,3119.93 1628.99,3173.12 1648.43,3192.56 1744.09,3192.56 1788.98,3147.68 1788.98,3092.95
  other v1: 1723.62,917.17 1066.93,927.4 633.86,933.31 87.4,936.85 293.7,940 222.83,940.79 830.71,941.18 512.2,943.15 891.73,943.15 338.19,945.12 440.16,944.72 605.51,946.3 387.8,947.09 1934.25,949.45 61.81,958.11 772.83,957.72 1718.5,958.11 1917.32,1063.23 1896.46,1112.83 1261.81,1143.94 31.5,1189.21 403.54,1202.99 1909.45,1210.87 1120.08,1226.61 651.97,1235.28 118.11,1242.36 366.54,1249.84 297.24,1285.67 608.27,1291.18 1070.87,1307.32 1141.73,1309.29 1196.85,1327.01 685.04,1332.91 1913.39,1348.66 616.14,1380.16 25.2,1399.45 354.33,1403.78 1009.84,1407.72 1840.55,1415.59 1336.61,1417.56 1393.31,1419.53 1584.65,1425.43 1907.48,1441.18 1631.89,1458.9 1738.19,1464.8 1244.09,1478.58 874.02,1480.55 307.09,1482.52 1362.2,1492.36 1307.09,1496.3 1047.24,1510.08 991.34,1541.18 192.91,1541.57 1661.42,1553.39 572.83,1559.29 490.16,1561.26 1539.37,1578.98 419.29,1586.46 27.56,1587.64 371.26,1591.97 145.67,1611.65 337.4,1615.59 1098.82,1620.31 649.61,1623.07 921.26,1625.04 1635.83,1626.22 1742.13,1626.22 1909.45,1626.22 1828.74,1628.19 527.56,1668.35 761.81,1673.46 982.28,1673.86 1383.86,1673.46 1771.65,1673.46 1236.22,1677.4 1723.62,1807.17 1066.93,1817.4 633.86,1823.31 87.4,1826.85 293.7,1830 222.83,1830.79 830.71,1831.18 512.2,1833.15 891.73,1833.15 338.19,1835.12 440.16,1834.72 605.51,1836.3 387.8,1837.09 1934.25,1839.45 61.81,1848.11 772.83,1847.72 1718.5,1848.11 1917.32,1953.23 1896.46,2002.83 1261.81,2033.94 31.5,2079.21 403.54,2092.99 1909.45,2100.87 1120.08,2116.61 651.97,2125.28 118.11,2132.36 366.54,2139.84 297.24,2175.67 608.27,2181.18 1070.87,2197.32 1141.73,2199.29 1196.85,2217.01 685.04,2222.91 1913.39,2238.66 616.14,2270.16 25.2,2289.45 354.33,2293.78 1009.84,2297.72 1840.55,2305.59 1336.61,2307.56 1393.31,2309.53 1584.65,2315.43 1907.48,2331.18 1631.89,2348.9 1738.19,2354.8 1244.09,2368.58 874.02,2370.55 307.09,2372.52 1362.2,2382.36 1307.09,2386.3 1047.24,2400.08 991.34,2431.18 192.91,2431.57 1661.42,2443.39 572.83,2449.29 490.16,2451.26 1539.37,2468.98 419.29,2476.46 27.56,2477.64 371.26,2481.97 145.67,2501.65 337.4,2505.59 1098.82,2510.31 649.61,2513.07 921.26,2515.04 1635.83,2516.22 1742.13,2516.22 1909.45,2516.22 1828.74,2518.19 527.56,2558.35 761.81,2563.46 982.28,2563.86 1383.86,2563.46 1771.65,2563.46 1236.22,2567.4 1723.62,2692.17 1066.93,2702.4 633.86,2708.31 87.4,2711.85 293.7,2715 222.83,2715.79 830.71,2716.18 512.2,2718.15 891.73,2718.15 338.19,2720.12 440.16,2719.72 605.51,2721.3 387.8,2722.09 1934.25,2724.45 61.81,2733.11 772.83,2732.72 1718.5,2733.11 1917.32,2838.23 1896.46,2887.83 1261.81,2918.94 31.5,2964.21 403.54,2977.99 1909.45,2985.87 1120.08,3001.61 651.97,3010.28 118.11,3017.36 366.54,3024.84 297.24,3060.67 608.27,3066.18 1070.87,3082.32 1141.73,3084.29 1196.85,3102.01 685.04,3107.91 1913.39,3123.66 616.14,3155.16 25.2,3174.45 354.33,3178.78 1009.84,3182.72 1840.55,3190.59 1336.61,3192.56 1393.31,3194.53 1584.65,3200.43 1907.48,3216.18 1631.89,3233.9 1738.19,3239.8 1244.09,3253.58 874.02,3255.55 307.09,3257.52 1362.2,3267.36 1307.09,3271.3 1047.24,3285.08 991.34,3316.18 192.91,3316.57 1661.42,3328.39 572.83,3334.29 490.16,3336.26 1539.37,3353.98 419.29,3361.46 27.56,3362.64 371.26,3366.97 145.67,3386.65 337.4,3390.59 1098.82,3395.31 649.61,3398.07 921.26,3400.04 1635.83,3401.22 1742.13,3401.22 1909.45,3401.22 1828.74,3403.19 527.56,3443.35 761.81,3448.46 982.28,3448.86 1383.86,3448.46 1771.65,3448.46 1236.22,3452.4

## Polygon pours and split planes (outlines as drawn)
no net on Top "Top-GGND" (solid, remove dead copper, pour order 9): -3.15,2665 2215,2665 2215,3483.5 -3.15,3483.5
no net on Top "Top-GGND" (solid, remove dead copper, pour order 10): -3.15,1780 2215,1780 2215,2598.5 -3.15,2598.5
no net on Top "Top-GGND" (solid, remove dead copper, pour order 11): -3.15,890 2215,890 2215,1708.5 -3.15,1708.5
GGND on Top "Top-GGND" (solid, remove dead copper, pour order 12): -3.15,0 2215,0 2215,818.5 -3.15,818.5
no net on Bottom "Bottom-GGND" (solid, remove dead copper, pour order 13): -6.69,2665 2210,2665 2210,3475.24 -6.69,3475.24
no net on Bottom "Bottom-GGND" (solid, remove dead copper, pour order 14): -6.69,1780 2210,1780 2210,2590.24 -6.69,2590.24
no net on Bottom "Bottom-GGND" (solid, remove dead copper, pour order 15): -6.69,890 2210,890 2210,1700.24 -6.69,1700.24
GGND on Bottom "Bottom-GGND" (solid, remove dead copper, pour order 16): -6.69,0 2210,0 2210,810.24 -6.69,810.24

## Keep-outs
Keep-Out Layer:
  lines w10: 0,59.01 ccw(c56.63,56.63) 59.1,0 ; 0,59.01 0,345 -35,345 -190,345 -190,3120 -35,3120 0,3120 0,3413.03 cw(c57.94,3414.14) 59.06,3472.09 2160,3472.09 cw(c2157.3,3410.34) 2219.06,3413.03 2219.06,2724.06 cw(c2159.85,2724.26) 2159.95,2665.05 ; 0,748.03 cw(c57.94,749.14) 59.06,807.09 2160,807.09 cw(c2157.3,745.34) 2219.06,748.03 2219.06,59.06 cw(c2159.85,59.26) 2159.95,0.05 ; 0,750 0,475 -55,475 -55,1225 0,1225 0,949.01 ; 0,949.01 ccw(c56.63,946.63) 59.1,890 ; 0,1839.01 ccw(c56.63,1836.63) 59.1,1780 ; 0,1839.01 0,2125 -55,2125 -55,1350 0,1350 0,1638.03 cw(c57.94,1639.14) 59.06,1697.09 2160,1697.09 cw(c2157.3,1635.34) 2219.06,1638.03 2219.06,949.06 cw(c2159.85,949.26) 2159.95,890.05 ; 0,2724.01 ccw(c56.63,2721.63) 59.1,2665 ; 0,2724.01 0,2990 -55,2990 -55,2250 0,2250 0,2528.03 cw(c57.94,2529.14) 59.06,2587.09 2160,2587.09 cw(c2157.3,2525.34) 2219.06,2528.03 2219.06,1839.06 cw(c2159.85,1839.26) 2159.95,1780.05 ; 59.06,0 2160,0 ; 59.06,890 2160,890 ; 59.06,1780 2160,1780 ; 59.06,2665 2160,2665

## Silkscreen, mask and mechanical layers (free items; w line width, h text height)
Silkscreen Top:
  lines w5.91: 673.23,376.77 956.69,376.77 ; 673.23,1266.77 956.69,1266.77 ; 673.23,2156.77 956.69,2156.77 ; 673.23,3041.77 956.69,3041.77 ; 35.43,19.69 351.57,19.69 351.57,669.29 35.43,669.29 35.43,19.69 ; 35.43,909.69 35.43,1559.29 351.57,1559.29 351.57,909.69 35.43,909.69 ; 35.43,1799.69 35.43,2449.29 351.57,2449.29 351.57,1799.69 35.43,1799.69 ; 35.43,2684.69 35.43,3334.29 351.57,3334.29 351.57,2684.69 35.43,2684.69 ; 364.96,19.69 364.96,669.29 1097.24,669.29 1097.24,229.53 661.42,229.53 661.42,19.69 364.96,19.69 ; 364.96,909.69 661.42,909.69 661.42,1119.53 1097.24,1119.53 1097.24,1559.29 364.96,1559.29 364.96,909.69 ; 364.96,1799.69 661.42,1799.69 661.42,2009.53 1097.24,2009.53 1097.24,2449.29 364.96,2449.29 364.96,1799.69 ; 364.96,2684.69 661.42,2684.69 661.42,2894.53 1097.24,2894.53 1097.24,3334.29 364.96,3334.29 364.96,2684.69 ; 659.84,248.03 1083.86,248.03 1083.86,530.31 659.84,530.31 659.84,248.03 ; 659.84,1138.03 659.84,1420.31 1083.86,1420.31 1083.86,1138.03 659.84,1138.03 ; 659.84,2028.03 659.84,2310.31 1083.86,2310.31 1083.86,2028.03 659.84,2028.03 ; 659.84,2913.03 659.84,3195.31 1083.86,3195.31 1083.86,2913.03 659.84,2913.03
  lines w11.81: 108.12,556.69 287.84,556.69 ; 108.12,1446.69 287.84,1446.69 ; 108.12,2336.69 287.84,2336.69 ; 108.12,3221.69 287.84,3221.69 ; 181.74,317.22 206.15,264.47 206.15,555.22 ; 181.74,1207.22 206.15,1154.47 206.15,1445.22 ; 181.74,2097.22 206.15,2044.47 206.15,2335.22 ; 181.74,2982.22 206.15,2929.47 206.15,3220.22 ; 421.51,553.15 601.23,553.15 ; 421.51,1443.15 601.23,1443.15 ; 421.51,2333.15 601.23,2333.15 ; 421.51,3218.15 601.23,3218.15 ; 495.13,313.68 519.54,260.93 519.54,551.67 ; 495.13,1203.68 519.54,1150.93 519.54,1441.67 ; 495.13,2093.68 519.54,2040.93 519.54,2331.67 ; 495.13,2978.68 519.54,2925.93 519.54,3216.67 ; 105.36,154.72 292.67,154.72 292.67,653.15 105.36,653.15 105.36,154.72 ; 105.36,1044.72 105.36,1543.15 292.67,1543.15 292.67,1044.72 105.36,1044.72 ; 105.36,1934.72 105.36,2433.15 292.67,2433.15 292.67,1934.72 105.36,1934.72 ; 105.36,2819.72 105.36,3318.15 292.67,3318.15 292.67,2819.72 105.36,2819.72 ; 418.75,151.18 606.05,151.18 606.05,649.61 418.75,649.61 418.75,151.18 ; 418.75,1041.18 418.75,1539.61 606.05,1539.61 606.05,1041.18 418.75,1041.18 ; 418.75,1931.18 418.75,2429.61 606.05,2429.61 606.05,1931.18 418.75,1931.18 ; 418.75,2816.18 418.75,3314.61 606.05,3314.61 606.05,2816.18 418.75,2816.18
  text "VDD" at 627.95,3411.06 h25.59
  text "VCC" at 330.31,3409.09 h25.59
  text "1.0" at 1229.53,3281.54 h29.53
  text "0.7" at 1326.38,3281.93 h29.53
  text "1.1" at 1132.28,3280.75 h29.53
  text "0.6" at 1427.95,3280.75 h29.53
  text "WP" at 348.43,3244.92 h25.59 r90
  text "CS" at 405.91,3241.38 h25.59 r90
  text "CS" at 89.37,3239.02 h25.59 r90
  text "WP" at 657.09,3232.72 h25.59 r90
  text "HW SPI Jumpers" at 681.89,3213.82 h29.53
  text "Int:R7=R8=0R" at 704.33,3145.71 h29.53
  text "VPP" at 87.8,3139.8 h25.59 r90
  text "VPP" at 412.2,3137.05 h25.59 r90
  text "VCC" at 347.24,3133.11 h25.59 r90
  text "VCC" at 655.91,3120.91 h25.59 r90
  text "GND" at 89.37,3032.72 h25.59 r90
  text "GND" at 343.31,3031.54 h25.59 r90
  text "GND" at 405.51,3028.78 h25.59 r90
  text "GND" at 651.97,3019.33 h25.59 r90
  text "P2.4" at 88.58,2929.57 h25.59 r90
  text "P2.3" at 343.31,2927.2 h25.59 r90
  text "Ext:R9=R10=R13=0R" at 665.35,2918.15 h25.59
  text "POWER" at 1270.47,2880.75 h39.37
  text "MISO" at 649.21,2823.66 h25.59 r90
  text "MOSI" at 90.55,2819.33 h25.59 r90
  text "MISO" at 342.52,2817.36 h25.59 r90
  text "MOSI" at 406.69,2815.39 h25.59 r90
  text "VDD" at 1130.71,2785.47 h29.53
  text "C2D" at 1230.71,2786.26 h29.53
  text "CK" at 1374.41,2783.5 h29.53
  text "GND" at 1445.67,2784.29 h29.53
  text "SW" at 188.19,2705.16 h49.21 r90
  text "HW" at 505.51,2700.43 h49.21 r90
  text "SPI" at 269.29,2698.46 h49.21 r90
  text "MCU_FOR_DOWMLOAD_v1.0" at 1627.17,2694.92 h29.53
  text "SPI" at 590.16,2693.74 h49.21 r90
  text "VDD" at 627.95,2526.06 h25.59
  text "VCC" at 330.31,2524.09 h25.59
  text "1.0" at 1229.53,2396.54 h29.53
  text "0.7" at 1326.38,2396.93 h29.53
  text "1.1" at 1132.28,2395.75 h29.53
  text "0.6" at 1427.95,2395.75 h29.53
  text "WP" at 348.43,2359.92 h25.59 r90
  text "CS" at 405.91,2356.38 h25.59 r90
  text "CS" at 89.37,2354.02 h25.59 r90
  text "WP" at 657.09,2347.72 h25.59 r90
  text "HW SPI Jumpers" at 681.89,2328.82 h29.53
  text "Int:R7=R8=0R" at 704.33,2260.71 h29.53
  text "VPP" at 87.8,2254.8 h25.59 r90
  text "VPP" at 412.2,2252.05 h25.59 r90
  text "VCC" at 347.24,2248.11 h25.59 r90
  text "VCC" at 655.91,2235.91 h25.59 r90
  text "GND" at 89.37,2147.72 h25.59 r90
  text "GND" at 343.31,2146.54 h25.59 r90
  text "GND" at 405.51,2143.78 h25.59 r90
  text "GND" at 651.97,2134.33 h25.59 r90
  text "P2.4" at 88.58,2044.57 h25.59 r90
  text "P2.3" at 343.31,2042.2 h25.59 r90
  text "Ext:R9=R10=R13=0R" at 665.35,2033.15 h25.59
  text "POWER" at 1270.47,1995.75 h39.37
  text "MISO" at 649.21,1938.66 h25.59 r90
  text "MOSI" at 90.55,1934.33 h25.59 r90
  text "MISO" at 342.52,1932.36 h25.59 r90
  text "MOSI" at 406.69,1930.39 h25.59 r90
  text "VDD" at 1130.71,1900.47 h29.53
  text "C2D" at 1230.71,1901.26 h29.53
  text "CK" at 1374.41,1898.5 h29.53
  text "GND" at 1445.67,1899.29 h29.53
  text "SW" at 188.19,1820.16 h49.21 r90
  text "HW" at 505.51,1815.43 h49.21 r90
  text "SPI" at 269.29,1813.46 h49.21 r90
  text "MCU_FOR_DOWMLOAD_v1.0" at 1627.17,1809.92 h29.53
  text "SPI" at 590.16,1808.74 h49.21 r90
  text "VDD" at 627.95,1636.06 h25.59
  text "VCC" at 330.31,1634.09 h25.59
  text "1.0" at 1229.53,1506.54 h29.53
  text "0.7" at 1326.38,1506.93 h29.53
  text "1.1" at 1132.28,1505.75 h29.53
  text "0.6" at 1427.95,1505.75 h29.53
  text "WP" at 348.43,1469.92 h25.59 r90
  text "CS" at 405.91,1466.38 h25.59 r90
  text "CS" at 89.37,1464.02 h25.59 r90
  text "WP" at 657.09,1457.72 h25.59 r90
  text "HW SPI Jumpers" at 681.89,1438.82 h29.53
  text "Int:R7=R8=0R" at 704.33,1370.71 h29.53
  text "VPP" at 87.8,1364.8 h25.59 r90
  text "VPP" at 412.2,1362.05 h25.59 r90
  text "VCC" at 347.24,1358.11 h25.59 r90
  text "VCC" at 655.91,1345.91 h25.59 r90
  text "GND" at 89.37,1257.72 h25.59 r90
  text "GND" at 343.31,1256.54 h25.59 r90
  text "GND" at 405.51,1253.78 h25.59 r90
  text "GND" at 651.97,1244.33 h25.59 r90
  text "P2.4" at 88.58,1154.57 h25.59 r90
  text "P2.3" at 343.31,1152.2 h25.59 r90
  text "Ext:R9=R10=R13=0R" at 665.35,1143.15 h25.59
  text "POWER" at 1270.47,1105.75 h39.37
  text "MISO" at 649.21,1048.66 h25.59 r90
  text "MOSI" at 90.55,1044.33 h25.59 r90
  text "MISO" at 342.52,1042.36 h25.59 r90
  text "MOSI" at 406.69,1040.39 h25.59 r90
  text "VDD" at 1130.71,1010.47 h29.53
  text "C2D" at 1230.71,1011.26 h29.53
  text "CK" at 1374.41,1008.5 h29.53
  text "GND" at 1445.67,1009.29 h29.53
  text "SW" at 188.19,930.16 h49.21 r90
  text "HW" at 505.51,925.43 h49.21 r90
  text "SPI" at 269.29,923.46 h49.21 r90
  text "MCU_FOR_DOWMLOAD_v1.0" at 1627.17,919.92 h29.53
  text "SPI" at 590.16,918.74 h49.21 r90
  text "VDD" at 627.95,746.06 h25.59
  text "VCC" at 330.31,744.09 h25.59
  text "1.0" at 1229.53,616.54 h29.53
  text "0.7" at 1326.38,616.93 h29.53
  text "1.1" at 1132.28,615.75 h29.53
  text "0.6" at 1427.95,615.75 h29.53
  text "WP" at 348.43,579.92 h25.59 r90
  text "CS" at 405.91,576.38 h25.59 r90
  text "CS" at 89.37,574.02 h25.59 r90
  text "WP" at 657.09,567.72 h25.59 r90
  text "HW SPI Jumpers" at 681.89,548.82 h29.53
  text "Int:R7=R8=0R" at 704.33,480.71 h29.53
  text "VPP" at 87.8,474.8 h25.59 r90
  text "VPP" at 412.2,472.05 h25.59 r90
  text "VCC" at 347.24,468.11 h25.59 r90
  text "VCC" at 655.91,455.91 h25.59 r90
  text "GND" at 89.37,367.72 h25.59 r90
  text "GND" at 343.31,366.54 h25.59 r90
  text "GND" at 405.51,363.78 h25.59 r90
  text "GND" at 651.97,354.33 h25.59 r90
  text "P2.4" at 88.58,264.57 h25.59 r90
  text "P2.3" at 343.31,262.2 h25.59 r90
  text "Ext:R9=R10=R13=0R" at 665.35,253.15 h25.59
  text "POWER" at 1270.47,215.75 h39.37
  text "MISO" at 649.21,158.66 h25.59 r90
  text "MOSI" at 90.55,154.33 h25.59 r90
  text "MISO" at 342.52,152.36 h25.59 r90
  text "MOSI" at 406.69,150.39 h25.59 r90
  text "VDD" at 1130.71,120.47 h29.53
  text "C2D" at 1230.71,121.26 h29.53
  text "CK" at 1374.41,118.5 h29.53
  text "GND" at 1445.67,119.29 h29.53
  text "SW" at 188.19,40.16 h49.21 r90
  text "HW" at 505.51,35.43 h49.21 r90
  text "SPI" at 269.29,33.46 h49.21 r90
  text "MCU_FOR_DOWMLOAD_v1.0" at 1627.17,29.92 h29.53
  text "SPI" at 590.16,28.74 h49.21 r90
Silkscreen Bottom:
  lines w11.81: 103.4,156.3 290.7,156.3 290.7,654.72 103.4,654.72 103.4,156.3 ; 103.4,1046.3 103.4,1544.72 290.7,1544.72 290.7,1046.3 103.4,1046.3 ; 103.4,1936.3 103.4,2434.72 290.7,2434.72 290.7,1936.3 103.4,1936.3 ; 103.4,2821.3 103.4,3319.72 290.7,3319.72 290.7,2821.3 103.4,2821.3 ; 416.78,152.76 604.08,152.76 604.08,651.18 416.78,651.18 416.78,152.76 ; 416.78,1042.76 416.78,1541.18 604.08,1541.18 604.08,1042.76 416.78,1042.76 ; 416.78,1932.76 416.78,2431.18 604.08,2431.18 604.08,1932.76 416.78,1932.76 ; 416.78,2817.76 416.78,3316.18 604.08,3316.18 604.08,2817.76 416.78,2817.76
Drill Drawing:
  lines w1: 42.78,-3.1 42.8,-3.1 ; 42.78,886.9 42.8,886.9 ; 42.78,1776.9 42.8,1776.9 ; 42.78,2661.9 42.8,2661.9